# EAGLE board vlsibreakout (EAGLE 6.3)
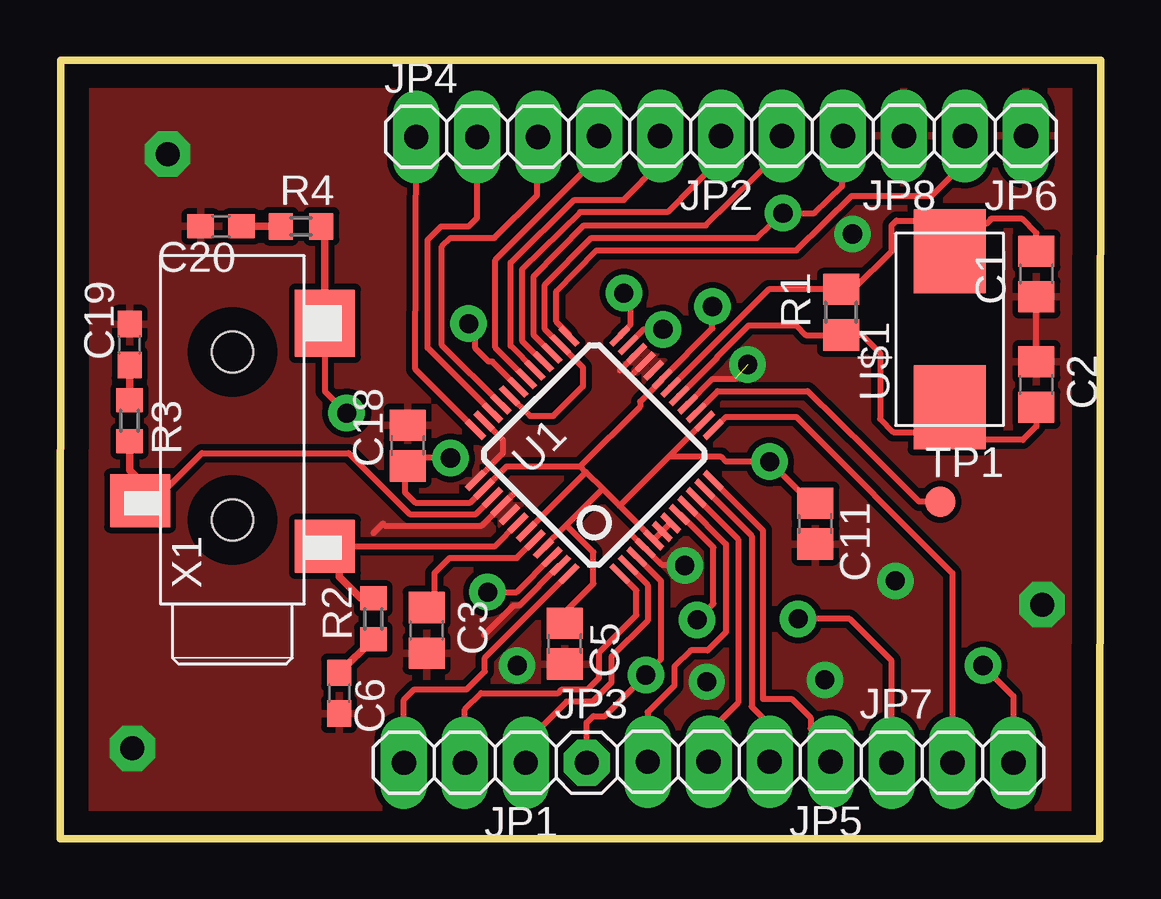
[diagram p0: board, top side]
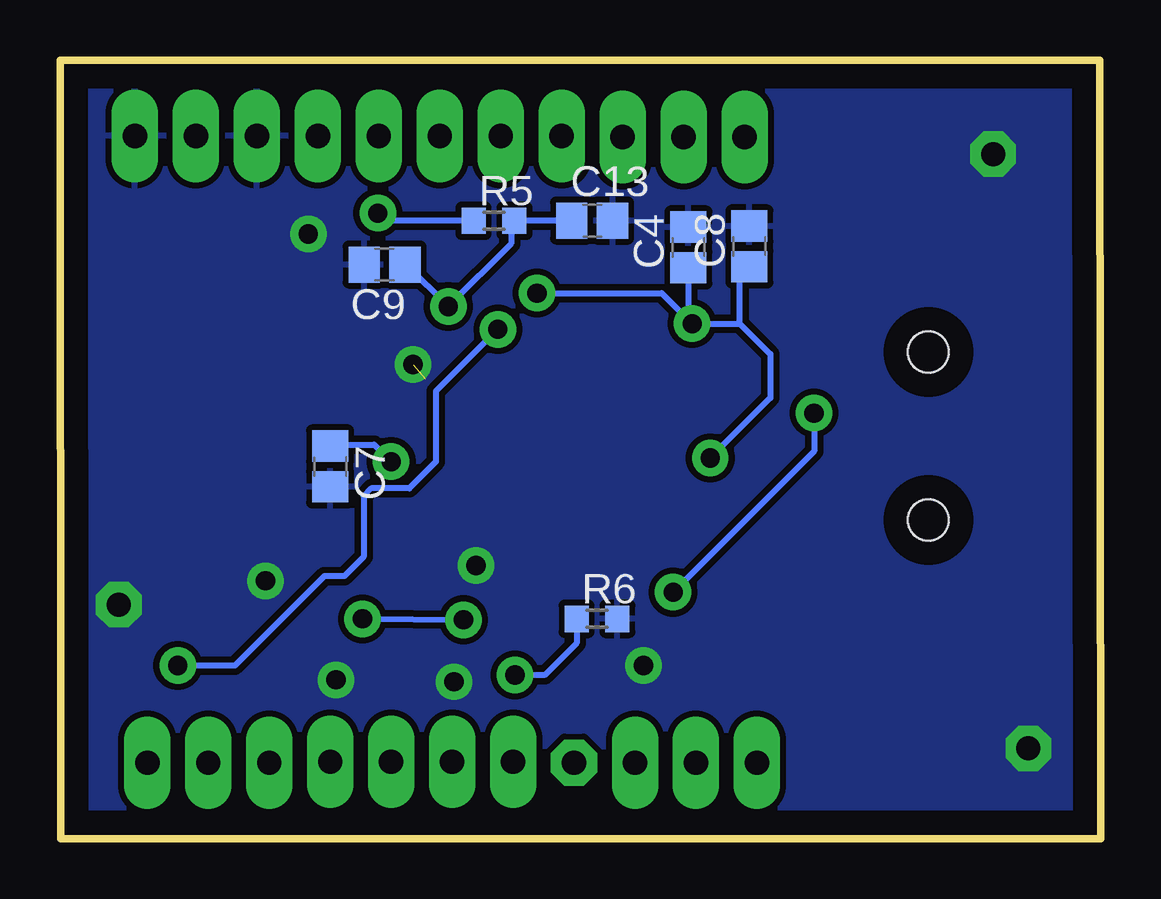
[diagram p1: board, bottom side, seen from below]

Size 43.37 x 32.45 mm. Coordinates in mm from the lower left corner, seen from the top.
Outline: 0,0 43.33,0 43.37,32.45 0.04,32.45 0,0
Copper layers (1*16): Top 0.035mm / dielectric 1.5mm / Bottom 0.035mm
Design rules "default *": minimum track width 10mil, minimum drill 24mil, track to track 8mil, track to pad 8mil, pad to pad 8mil, via to via 8mil, smd to smd 8mil, copper to edge 40mil, drill to drill 8mil, minimum pad ring 10mil, minimum via ring 8mil, stop-mask expansion 4mil, vias tented up to drill 0mil, thermal gap 10mil

## Footprints (pad centres in the part's own frame; a part is rotated, then mirrored left to right if it is on the bottom)
C0805 = smd 1.3 x 1.5: 1 -0.95,0; 2 0.95,0
C0805' = smd 1.3 x 1.5: 1 -0.85,0; 2 0.85,0
C0603 = smd 1.1 x 1: 1 -0.85,0; 2 0.85,0
1X03 = drill 1.016 long: 1 -2.54,0; 2 0,0; 3 2.54,0
1X01 = drill 1.016 octagon: 1 0,0
1X04 = drill 1.016 long: 1 -3.81,0; 2 -1.27,0; 3 1.27,0; 4 3.81,0
1X02 = drill 1.016 long: 1 -1.27,0; 2 1.27,0
R0805 = smd 1.3 x 1.5: 1 -0.95,0; 2 0.95,0
R0603 = smd 1 x 1.1: 1 -0.85,0; 2 0.85,0
B1,27 = smd 1.27 x 1.27: TP 0,0
LQFP48 = smd 0.25 x 1: 1 -2.75,-4.25; 2 -2.25,-4.25; 3 -1.75,-4.25; 4 -1.25,-4.25; 5 -0.75,-4.25; 6 -0.25,-4.25; 7 0.25,-4.25; 8 0.75,-4.25; 9 1.25,-4.25; 10 1.75,-4.25; 11 2.25,-4.25; 12 2.75,-4.25; 25 2.75,4.25; 26 2.25,4.25; 27 1.75,4.25; 28 1.25,4.25; 29 0.75,4.25; 30 0.25,4.25; 31 -0.25,4.25; 32 -0.75,4.25; 33 -1.25,4.25; 34 -1.75,4.25; 35 -2.25,4.25; 36 -2.75,4.25 | smd 1 x 0.25: 13 4.25,-2.75; 14 4.25,-2.25; 15 4.25,-1.75; 16 4.25,-1.25; 17 4.25,-0.75; 18 4.25,-0.25; 19 4.25,0.25; 20 4.25,0.75; 21 4.25,1.25; 22 4.25,1.75; 23 4.25,2.25; 24 4.25,2.75; 37 -4.25,2.75; 38 -4.25,2.25; 39 -4.25,1.75; 40 -4.25,1.25; 41 -4.25,0.75; 42 -4.25,0.25; 43 -4.25,-0.25; 44 -4.25,-0.75; 45 -4.25,-1.25; 46 -4.25,-1.75; 47 -4.25,-2.25; 48 -4.25,-2.75
ABM2 = smd 3.5 x 3: P$1 -3.25,0; P$2 3.25,0
SJ-3523-SMT = smd 2.5 x 2.2: 1 3.85,-4.6; 3 -3.85,-2.7 | smd 2.5 x 2.8: 2 3.85,4.7 | hole 1.7: 0,-3.5; 0,3.5

## Placement (x,y rotation side)
C1  33pF  [C0805]  40.68,23.53 90 top
C2  33pF  [C0805]  40.68,18.93 270 top
C3  1uF  [C0805]  15.28,8.69 270 top
C4  10uF  [C0805']  17.18,24.65 90 bottom
C5  10uF  [C0805']  21.03,8.14 270 top
C6  47nF  [C0603]  11.63,6.07 270 top
C7  100nF  [C0805']  32.11,15.52 270 bottom
C8  100nF  [C0805']  14.64,24.69 90 bottom
C9  10uF  [C0805']  29.85,23.93 180 bottom
C11  10uF  [C0805']  31.47,13.14 270 top
C13  100nF  [C0805']  21.19,25.76 0 bottom
C18  100nF  [C0805']  14.49,16.39 90 top
C19  10nF  [C0603]  2.9,20.6 90 top
C20  10nF  [C0603]  6.71,25.52 180 top
JP1  [1X03]  16.87,3.18 180 top
JP2  [1X03]  25,29.29 180 top
JP3  [1X01]  21.95,3.18 0 top
JP4  [1X03]  17.38,29.25 0 top
JP5  [1X04]  28.3,3.21 180 top
JP6  [1X02]  38.97,29.29 180 top
JP7  [1X03]  37.19,3.18 0 top
JP8  [1X03]  32.62,29.29 180 top
R1  1M  [R0805]  32.54,21.95 90 top
R2  [R0603]  13.06,9.17 90 top
R3  [R0603]  2.9,17.42 270 top
R4  [R0603]  10.04,25.52 0 top
R5  100k  [R0603]  25.28,25.76 0 bottom
R6  100k  [R0603]  20.99,9.17 0 bottom
TP1  TPB1,27  [B1,27]  36.67,14.05 0 top
U1  VS1053-L  [LQFP48]  22.26,15.99 45 top
U$1  ABM2-XTAL  [ABM2]  37.07,21.23 90 top
X1  SJ-3523-SMT  [SJ-3523-SMT]  7.18,16.79 0 top

## Library data of the parts
C1-C3 C6 C19 C20 R1 R5 R6 = rcl
C4 C5 C7-C9 C11 C13 C18 R2-R4 = resistor
JP1-JP8 = pinhead
TP1 = testpad
U1 = vlsi
U$1 = armin
X1 = con-cuistack

## Nets
GBUF: R2.2 U1.42 X1.1
GND: C1.1 C2.1 C3.2 C4.2 C5.2 C6.2 C7.2 C8.2 C9.2 C11.2 C13.2 C18.2 C19.2 C20.2 JP6.1 JP8.1 R6.2 U1.4 U1.16 U1.20 U1.21 U1.22 U1.35 U1.37 U1.40 U1.41 U1.47
LEFT: R4.2 U1.46 X1.2
N$1: C3.1 U1.44
N$2: C2.2 R1.1 U1.17 U$1.P$1
N$3: C1.2 R1.2 U1.18 U$1.P$2
N$4: C6.1 R2.1
N$5: C19.1 R3.1
N$6: C20.1 R4.1
N$7: JP1.1 U1.2
N$8: JP1.2 U1.1
N$9: JP1.3 U1.48
N$10: JP2.1 U1.28
N$11: JP2.2 U1.29
N$12: JP2.3 U1.30
N$13: JP8.2 R5.1 U1.26 U1.32
N$14: JP8.3 U1.27
N$15: JP3.1 R6.1 U1.3
N$16: JP4.3 U1.33
N$17: JP4.2 U1.34
N$18: JP4.1 U1.36
N$19: JP5.4 U1.9
N$20: JP5.3 U1.10
N$21: JP5.2 U1.11
N$22: JP5.1 U1.12
N$23: JP6.2 U1.25
N$24: JP7.1 U1.8
N$25: JP7.2 U1.13
N$26: JP7.3 U1.23
N$27: TP1.TP U1.15
RIGHT: R3.2 U1.39 X1.3
VCC: C4.1 C5.1 C7.1 C8.1 C9.1 C11.1 C13.1 C18.1 R5.2 U1.5 U1.6 U1.7 U1.14 U1.19 U1.24 U1.31 U1.38 U1.43 U1.45

## Tracks (layer width: path | path; a pad name or v marks a point on that pad's centre or on a via)
GBUF
  Top 0.254: X1.1 18.1,12.19 U1.42
  Top 0.305: R2.2 12.52,10.02 11.63,10.91 11.63,12.07 X1.1
GND  (via drill 0.8, 1)  (1 unrouted)
  Top 0.254: C2.1 C1.1 | U1.35 18.45,16.63 18.45,16.07 U1.37 | U1.16 26.15,18.14 27.19,19.17 28.14,19.17 | U1.47 20.8,11.4 19.13,9.72 18.89,9.72 17.66,8.49 | 23.83,12.66 U1.4 24.41,12.1 25.08,11.43 25.99,11.43 v26.03,11.39 | 19.01,14.49 18.4,13.87 U1.40 18.38,13.85 17.58,13.06 13.53,13.06 13.45,13.14 13.06,12.74 | U1.21 23.79,19.29 23.73,19.29 23.49,19.53 23.34,19.53 24.03,20.22 U1.22
  other vias: 34.81,10.76 31.87,6.63 26.95,6.55 19.05,7.22 28.65,19.76 4.48,28.54 3.02,3.77 40.92,9.76 33.02,25.2
  pour Top (isolate 0.254): -3.57,51.75 80.68,51.55 80.68,-17.18 -3.57,-16.99
  pour Bottom (isolate 0.254): -12.66,46.95 53.38,46.95 53.38,-13.37 -14.57,-13.37 -14.57,46.95
LEFT  (via drill 0.8)
  Top 0.254: X1.2 11.03,18.65 v11.95,17.74 | v17.82,10.28 19.02,10.28 U1.46
  Top 0.305: X1.2 11.03,25.5 R4.2
  Bottom 0.254: v11.95,17.74 11.95,16.15 v17.82,10.28
N$1
  Top 0.254: C3.1 15.6,10.12 15.6,11.07 16.23,11.71 19.04,11.71 U1.44
N$2
  Top 0.254: U1.17 27.38,20.04 27.38,20.08 28.69,21.39 30.68,21.39 31.08,21 R1.1 33.42,21 34.17,20.24 34.17,17.5 34.73,16.95 37.23,16.95 37.35,17.22 | C2.2 40.68,17.18 40.12,16.63 37.94,16.63 37.35,17.22 | 37.35,17.22 37.35,17.71 U$1.P$1
N$3
  Top 0.254: 37.42,24.49 U$1.P$2 | C1.2 40.68,25.24 40.08,25.84 38.78,25.84 38.78,25.8 38.62,25.64 38.58,25.64 U$1.P$2 | U1.18 29.52,22.9 R1.2 33.06,22.9 34.65,24.49 34.65,25.56 34.85,25.76 36.87,25.76 36.99,25.64 36.99,24.88 37.03,24.84 37.03,25.16 37.27,25.16 37.35,25.08 37.5,25.08 | 37.5,25.08 38.06,25.08 | U$1.P$2 37.43,25 37.5,25.08
N$4
  Top 0.305: C6.1 R2.1
N$5
  Top 0.305: R3.1 C19.1
N$6
  Top 0.305: C20.1 R4.1
N$7
  Top 0.254: U1.2 24.49,10.59 24.49,9.09 22.98,7.58 22.98,6.51 22.18,5.71 21.11,5.71 19.41,4.01 JP1.1
N$8
  Top 0.254: JP1.2 16.87,3.77 16.87,5.4 17.54,6.07 20.76,6.07 20.91,6.23 21.99,6.23 22.46,6.71 22.46,7.78 24.01,9.33 24.01,10.36 U1.1
N$9
  Top 0.254: JP1.3 14.33,4.33 14.33,5.79 14.76,6.23 16.95,6.23 17.7,6.99 17.7,7.54 U1.48
N$10
  Top 0.254: JP2.1 27.5,28.34 25.32,26.11 21.67,26.11 19.25,23.73 19.25,20.76 20.12,19.88 U1.28
N$11
  Top 0.254: U1.29 18.77,20.55 18.77,24.01 21.43,26.63 23.49,26.63 24.96,28.14 JP2.2
N$12
  Top 0.254: U1.30 18.14,20.48 18.14,24.13 22.42,28.42 JP2.3
N$13  (via drill 0.8)
  Top 0.254: U1.26 | U1.26 20.2,21.23 20.2,23.1 22.15,25.04 29.05,25.04 v30.12,26.07 31.43,26.07 32.58,27.19 32.58,28.81 JP8.2 | U1.26 21.79,19.65 21.79,18.85 20.56,17.62 19.58,17.62 U1.32
  Bottom 0.254: R5.1 29.8,25.76 v30.12,26.07
N$14
  Top 0.254: JP8.3 30.04,28.65 26.91,25.56 21.83,25.56 19.72,23.42 19.72,21.01 U1.27
N$15  (via drill 0.8)
  Top 0.254: U1.3 25.04,10.74 25.04,7.5 v24.41,6.83 22.7,5.12 22.22,5.12 21.95,4.84 JP3.1
  Bottom 0.254: R6.1 21.84,8.16 23.18,6.83 v24.41,6.83
N$16
  Top 0.254: U1.33 15.91,20.58 15.91,24.69 16.27,25.04 18.1,25.04 19.88,26.83 JP4.3
N$17
  Top 0.254: U1.34 15.32,20.46 15.32,24.96 15.87,25.52 17.03,25.52 17.38,25.88 17.38,27.03 JP4.2
N$18
  Top 0.254: U1.36 14.8,19.57 JP4.1
N$19
  Top 0.254: U1.9 27.74,12.28 27.74,8.61 26.99,7.86 26.27,7.86 25.6,7.18 25.6,6.39 24.49,5.28 JP5.4
N$20
  Top 0.254: U1.10 28.26,12.48 28.26,5.68 27.03,4.44 JP5.3
N$21
  Top 0.254: U1.11 28.81,12.63 28.81,5.52 29.57,4.76 JP5.2
N$22
  Top 0.254: U1.12 29.29,12.86 29.29,5.83 30.48,5.83 31.27,5.04 31.27,4.6 32.11,3.77 32.11,2.98 JP5.1
N$23
  Top 0.254: U1.25 21.2,21.02 20.68,21.55 20.68,22.82 22.34,24.53 30.68,24.53 32.98,26.79 36.31,26.79 37.66,28.14 JP6.2
N$24  (via drill 0.8)
  Top 0.254: JP7.1 34.65,7.42 32.9,9.17 v30.76,9.17 | v26.55,9.13 27.23,9.8 27.23,12.14 25.85,13.52 U1.8
  Bottom 0.254: v30.76,9.17 v26.55,9.13
N$25
  Top 0.254: U1.13 27.74,17.58 30.68,17.58 37.19,11.07 JP7.2
N$26  (via drill 0.8)
  Top 0.254: U1.23 24.32,21.23 v25.12,21.23 | v38.46,7.22 39.73,5.95 JP7.3
  Bottom 0.254: v25.12,21.23 27.7,18.65 27.7,15.72 28.81,14.6 30.4,14.6 30.72,14.29 30.72,11.75 31.51,10.95 32.34,10.95 36.08,7.22 v38.46,7.22
N$27
  Top 0.254: U1.15 27.4,18.65 31.15,18.65 33.69,16.15 35.8,14.05 TP1.TP
RIGHT
  Top 0.254: X1.3 3.93,14.09 5.91,16.07 12.03,16.07 14.56,13.53 17.33,13.53 U1.39
  Top 0.305: X1.3 3.81,14.45 2.9,15.36 R3.2
VCC  (via drill 0.8)
  Top 0.254: 21.68,15.52 18.61,15.52 U1.38 17.1,14.01 14.8,14.01 14.38,14.43 14.38,15.52 C18.1 14.82,15.87 v16.27,15.87 | 21.68,15.52 21.91,15.29 | 21.91,15.29 22.61,14.59 | 22.61,14.59 23.32,13.88 | 23.32,13.88 U1.5 U1.6 U1.7 | U1.14 25.36,15.91 | 25.36,15.91 23.32,13.88 | 21.68,15.52 24.17,18.01 24.17,18.22 25.09,19.14 U1.19 27.19,21.27 v27.19,22.19 | 25.36,15.91 27.54,15.91 27.74,15.72 v29.57,15.72 31.3,13.99 C11.1 | U1.45 20.14,12.13 21.09,13.08 | 21.09,13.08 22.61,14.59 | U1.43 21.91,15.29 | C5.1 21.03,9.45 22.22,10.64 22.22,11.95 21.09,13.08 | v17.03,21.47 17.3,21.19 17.3,20.44 17.86,19.88 18.02,19.88 U1.31 | U1.24 23.32,20.98 23.77,21.43 23.77,22.46 v23.49,22.74
  Bottom 0.254: C13.1 R5.2 24.15,25.89 24.57,25.92 24.57,24.8 v27.19,22.19 28.93,23.93 C9.1 | C7.1 32.04,16.43 30.28,16.43 v29.57,15.72 | v17.03,21.47 15.04,21.47 | 15.04,21.47 13.77,20.2 13.77,18.38 v16.27,15.87 | v23.49,22.74 18.3,22.74 v17.03,21.47 | C4.1 17.18,21.63 v17.03,21.47 | 15.04,21.47 15.04,23.44 C8.1